# Altium PCB pcb.pcbdoc (part 2 of 6)
Units mm, origin at the board's own origin, x right, y up, seen from the top; angles counter-clockwise.
Board outline 95 x 60 mm, 4 copper layers (Top Layer, TopInt Layer, BotInt Layer, Bottom Layer), stack 1.459 mm thick; 162 components, 164 nets, 673 pads, 269 vias.
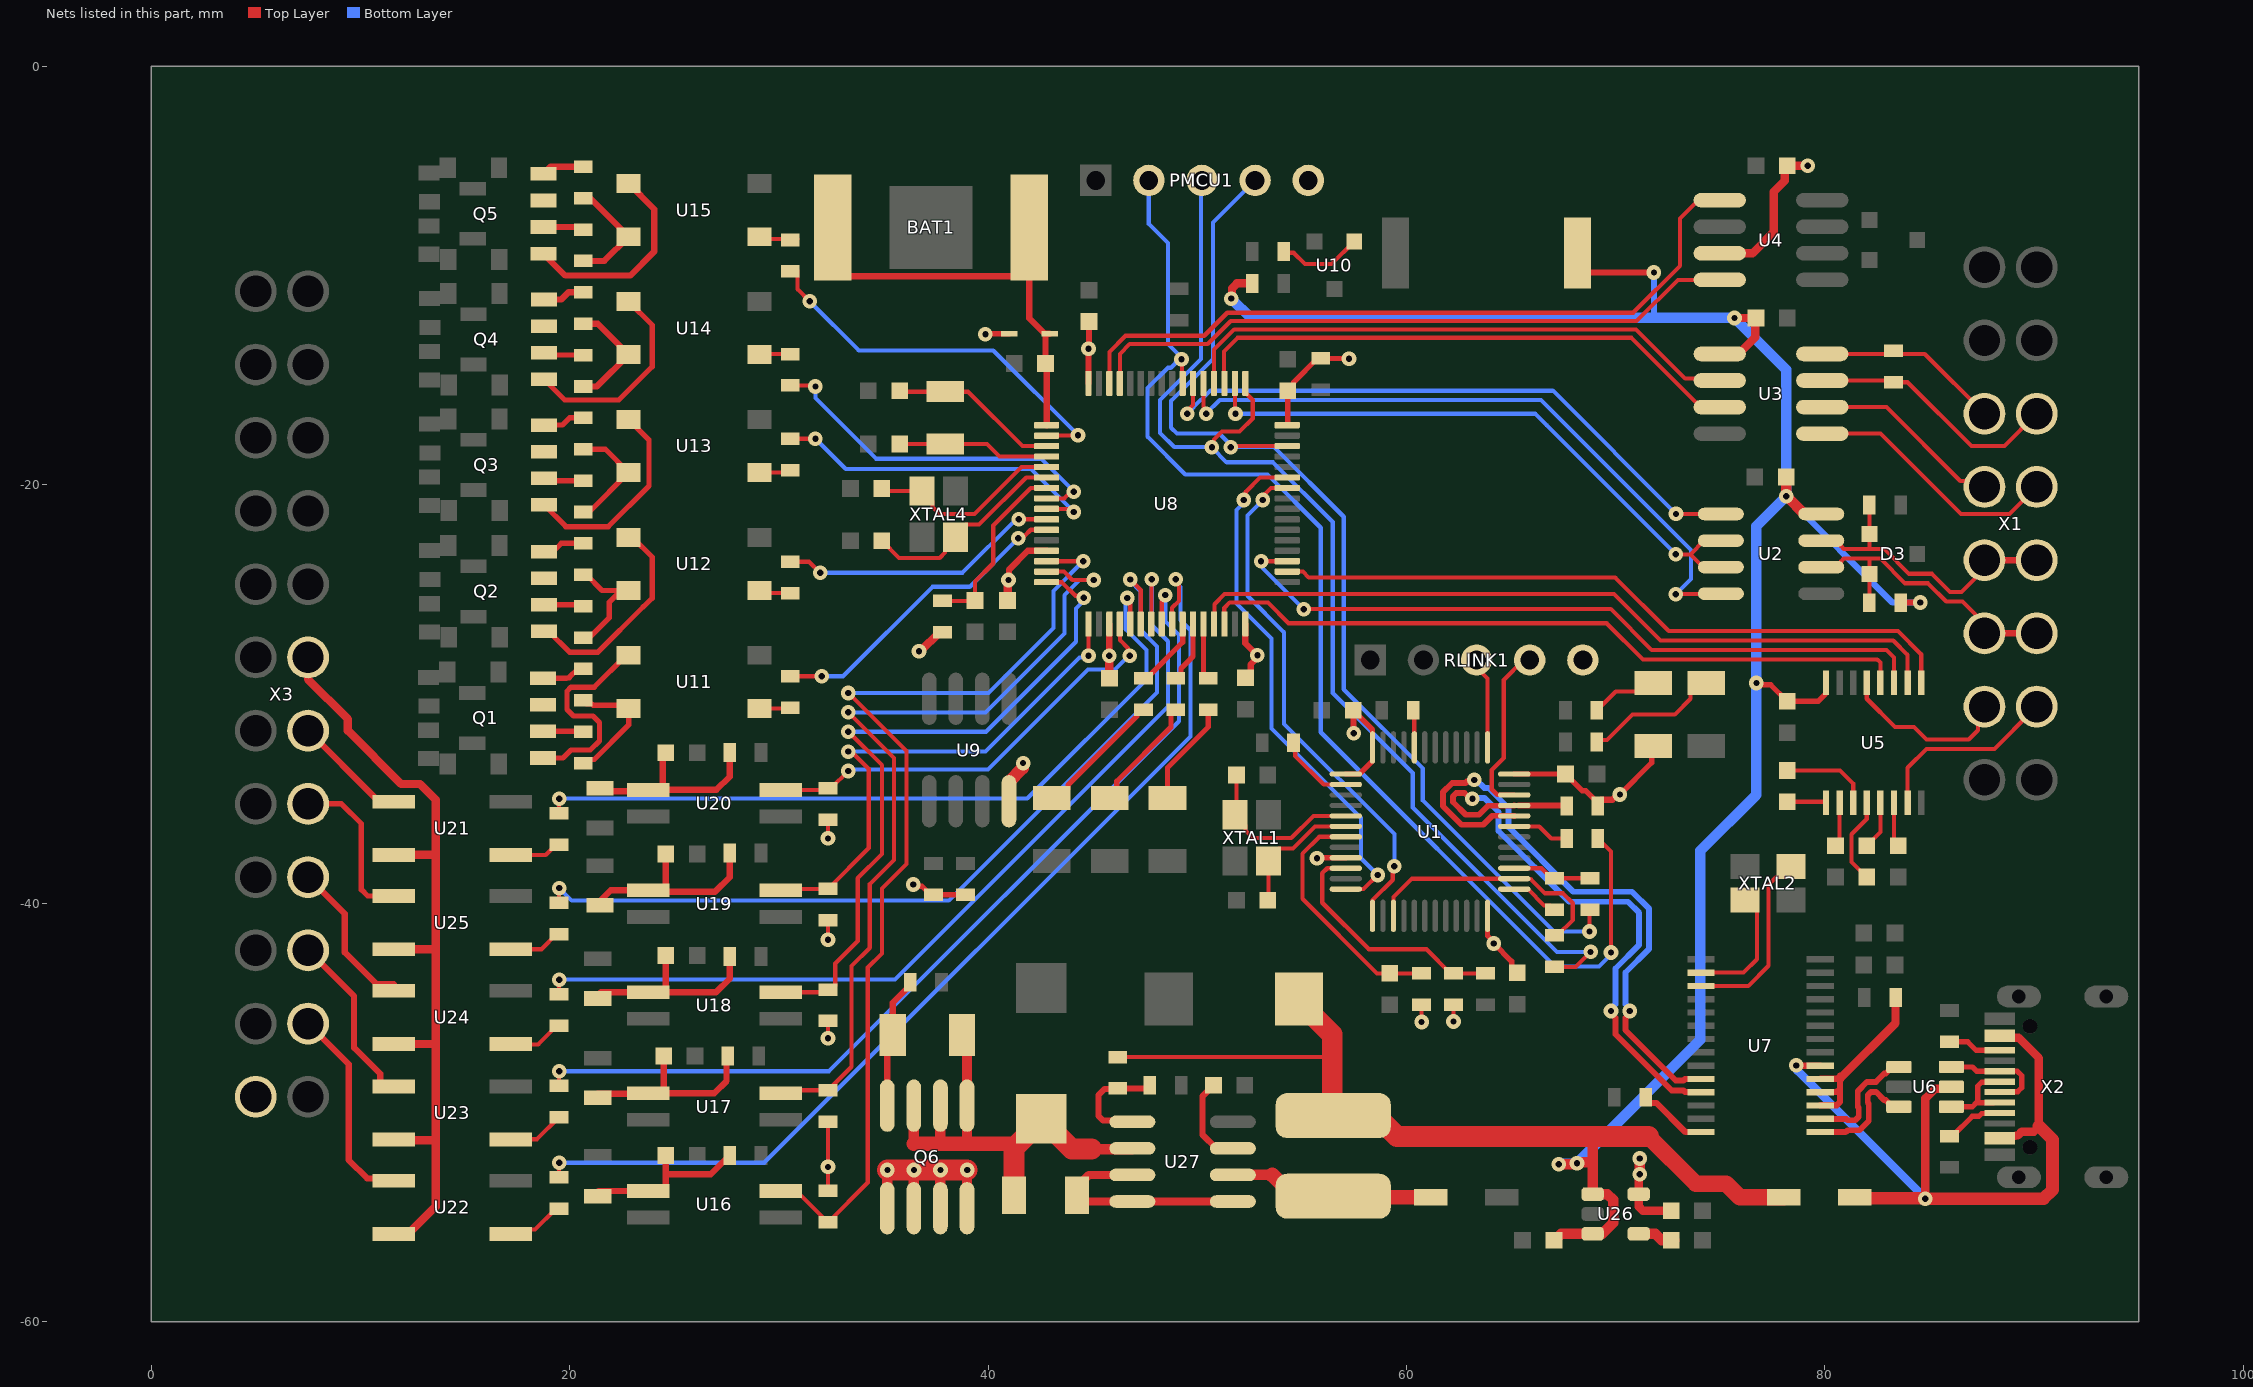
[diagram p4: the nets of this part, all layers, seen from the top]

## Via types
v1: diameter 0.7, hole 0.3, Top Layer to Bottom Layer, tented both sides, 249 vias
v2: diameter 1, hole 0.5, Top Layer to Bottom Layer, tented both sides, 20 vias

## Nets (pads, with @x,y where several pads share a name; then routed paths per layer and width w, separated by ;. In a path a pad name is that pad's centre, name@x,y a point inside that pad or via, vN(x,y) a via of type N, cw(c..) or ccw(c..) an arc to the next point about the centre after c; other vN are vias at no path point) (continued)
NetC4_2: C4.2 R10.1 U1.7 | length 11.7
  Top Layer w0.2: U1.7@57.1,-36.825 55.831,-36.825 55.025,-37.631 55.025,-39.786 58.589,-43.35 C4.2@59.2,-43.35 R10.1@60.725,-43.35
NetC5_2: C5.2 U1.6 XTAL1.1 | length 6.3
  Top Layer w0.2: C5.2@53.375,-39.85 53.4,-39.825 XTAL1.1@53.4,-37.975 53.4,-37.875 53.9,-37.375 54.575,-37.375 55.625,-36.325 U1.6@57.1,-36.325
NetC6_2: C6.2 U1.5 XTAL1.3 | length 8.3
  Top Layer w0.2: C6.2@51.875,-33.875 51.875,-35.7 XTAL1.3@51.8,-35.775 52.3,-36.275 52.3,-36.521 52.663,-36.884 54.491,-36.884 55.55,-35.825 U1.5@57.1,-35.825
NetC10_2: C10.2 U5.2 | length 2.1
  Top Layer w0.2: C10.2@80.5,-37.2 80.7,-37 U5.2@80.7,-35.2
NetC11_2: C11.2 U5.6 | length 2.2
  Top Layer w0.2: U5.6@83.3,-35.2 83.3,-37.3 C11.2@83.35,-37.35
NetC12_1: C12.1 U5.1 | length 1.9
  Top Layer w0.2: C12.1@78.2,-35.15 80,-35.15 U5.1@80.05,-35.2
NetC12_2: C12.2 U5.3 | length 4.3
  Top Layer w0.2: C12.2@78.2,-33.65 80.725,-33.65 81.35,-34.275 U5.3@81.35,-35.2
NetC14_1: C14.1 U5.4 | length 4
  Top Layer w0.2: C14.1@81.85,-38.7 81.85,-38.6 81.275,-38.025 81.275,-36.7 82,-35.975 U5.4@82,-35.2
NetC14_2: C14.2 U5.5 | length 2.4
  Top Layer w0.2: C14.2@81.85,-37.2 82.05,-37.2 82.65,-36.6 U5.5@82.65,-35.2
NetC28_2: C28.2 R30.2 R40.2 U16.1 | length 8.2
  Top Layer w0.3: R30.2@21.35,-53.8 21.4,-53.75 U16.1@23.75,-53.75 24.3,-53.75 24.6,-53.45 24.6,-52.95 ; C28.2@24.6,-52.05 24.6,-52.95 ; R40.2@27.65,-52.05 26.75,-52.95 24.6,-52.95
NetC29_2: C29.2 R31.2 R41.2 U17.1 | length 9.4
  Top Layer w0.3: R31.2@21.35,-49.1 23.73,-49.1 U17.1@23.75,-49.08 U17.1@24.55,-49.08 ; C29.2@24.5,-47.3 24.5,-49.03 U17.1@24.55,-49.08 ; R41.2@27.55,-47.3 27.5,-47.35 27.5,-48.5 26.92,-49.08 U17.1@24.55,-49.08
NetC30_2: C30.2 R32.2 R42.2 U18.1 | length 9.4
  Top Layer w0.3: R32.2@21.35,-44.4 21.5,-44.25 U18.1@23.75,-44.25 U18.1@24.6,-44.25 ; C30.2@24.6,-42.5 U18.1@24.6,-44.25 ; R42.2@27.65,-42.55 27.65,-43.6 27,-44.25 U18.1@24.6,-44.25
NetC31_2: C31.2 R33.2 R43.2 U19.1 | length 10.5
  Top Layer w0.3: R33.2@21.45,-39.9 21.97,-39.38 U19.1@23.75,-39.38 ; C31.2@24.6,-37.65 24.6,-39.38 U19.1@23.75,-39.38 ; R43.2@27.65,-37.6 27.65,-38.75 26.95,-39.45 23.82,-39.45 U19.1@23.75,-39.38
NetC32_2: C32.2 R34.2 R44.2 U20.1 | length 9.9
  Top Layer w0.3: R34.2@21.7,-34.65 23.68,-34.65 U20.1@23.75,-34.58 ; C32.2@24.6,-32.8 24.45,-32.95 24.45,-34.5 23.83,-34.5 U20.1@23.75,-34.58 ; R44.2@27.65,-32.8 27.65,-33.95 27.02,-34.58 U20.1@23.75,-34.58
NetC35_2: C35.2 U27.3 | length 4.3
  Top Layer w0.3: C35.2@50.775,-48.7 50.25,-49.225 50.25,-51.065 50.9,-51.715 U27.3@51.7,-51.715
NetC36_2: C36.2 U26.4 | length 1.8
  Top Layer w0.5: U26.4@71.099,-55.8 71.9,-55.8 72.2,-56.1 C36.2@72.65,-56.1 C36.2@72.8,-56.1
NetD1_2: D1.2 R5.1 | length 3.2
  Top Layer w0.2: R5.1@69.1,-30.775 70,-29.875 71.4,-29.875 D1.2@71.8,-29.475
NetD2_1: D2.1 R6.1 | length 6.6
  Top Layer w0.2: R6.1@69.1,-32.3 69.208,-32.192 69.583,-32.192 70.8,-30.975 72.825,-30.975 73.575,-30.225 73.575,-29.95 74.05,-29.475 D2.1@74.325,-29.475
NetD6_1: D6.1 R25.1 | length 5.6
  Top Layer w0.254: D6.1@45.825,-34.975 46.157,-34.643 46.157,-34.168 48.742,-31.583 48.742,-30.923 48.915,-30.75 R25.1@48.975,-30.75
NetD7_1: D7.1 R26.1 | length 5
  Top Layer w0.254: D7.1@48.575,-34.975 48.575,-33.525 50.525,-31.575 R26.1@50.525,-30.75
NetD8_1: D8.1 R24.1 | length 6.3
  Top Layer w0.254: D8.1@43.05,-34.975 43.375,-34.975 43.823,-34.527 43.823,-34.352 47.102,-31.073 47.102,-30.923 47.275,-30.75 R24.1@47.425,-30.75
NetD9_1: D9.1 Q6.4 R65.1 | length 6.3
  Top Layer w0.3: Q6.4@35.185,-49.673 35.185,-46.564 D9.1@35.449,-46.3 35.449,-44.751 36.275,-43.925 R65.1@36.275,-43.775
NetD11_2: D11.2 L1.1 U27.2 | length 10.4
  Top Layer w0.5: U27.2@51.7,-52.985 53.585,-52.985
  Top Layer w0.7: 53.585,-52.985 L1.1@55.05,-54.45 ; L1.1@54.7,-54.05 D11.2@61.15,-54.05
NetQ1_1: Q1.1 R45.2 | length 1.9
  Top Layer w0.254: Q1.1@18.725,-31.785 20.635,-31.785 R45.2@20.65,-31.8
NetQ1_2: Q1.2 Q1.5 U11.3 | length 10.6
  Top Layer w0.254: Q1.2@18.355,-33.055 Q1.2@18.725,-33.055 19.683,-33.055 20.065,-32.673 20.989,-32.673 21.427,-32.235 21.427,-31.365 21.112,-31.05 20.188,-31.05 19.873,-30.735 19.873,-29.865 20.065,-29.673 21.177,-29.673 22.7,-28.15 U11.3@22.825,-28.15
NetQ1_4: Q1.4 R46.2 | length 2.1
  Top Layer w0.254: Q1.4@18.725,-29.245 19.851,-29.245 19.981,-29.219 20.4,-28.8 R46.2@20.65,-28.8
NetQ2_1: Q2.1 R47.2 | length 1.9
  Top Layer w0.254: Q2.1@18.775,-25.735 20.585,-25.735 R47.2@20.65,-25.8
NetQ2_2: Q2.2 Q2.5 U12.3 | length 9.9
  Top Layer w0.254: Q2.2@19.005,-27.005 20,-28 21.35,-28 23.521,-25.829 23.535,-25.829 23.95,-25.415 23.95,-23.45 23.012,-22.512 U12.3@22.825,-22.512
NetQ2_4: Q2.4 R48.2 | length 2
  Top Layer w0.254: Q2.4@18.775,-23.195 19.205,-23.195 19.6,-22.8 R48.2@20.65,-22.8
NetQ3_1: Q3.1 R49.2 | length 1.8
  Top Layer w0.254: Q3.1@18.89,-19.8 R49.2@20.65,-19.8
NetQ3_2: Q3.2 Q3.5 U13.3 | length 9.8
  Top Layer w0.254: Q3.2@18.775,-20.955 19.82,-22 21.85,-22 23.8,-20.05 23.8,-17.85 U13.3@22.825,-16.875
NetQ3_4: Q3.4 R50.2 | length 2
  Top Layer w0.254: Q3.4@18.775,-17.145 19.655,-17.145 20,-16.8 R50.2@20.65,-16.8
NetQ4_1: Q4.1 R51.2 | length 1.8
  Top Layer w0.254: Q4.1@18.89,-13.8 R51.2@20.65,-13.8
NetQ4_2: Q4.2 Q4.5 U14.3 | length 9.8
  Top Layer w0.254: Q4.2@18.775,-14.955 19.77,-15.95 22.35,-15.95 23.95,-14.35 23.95,-12.363 U14.3@22.825,-11.237
NetQ4_4: Q4.4 R52.2 | length 2
  Top Layer w0.3: Q4.4@18.775,-11.145 19.605,-11.145 19.95,-10.8 R52.2@20.65,-10.8
NetQ5_1: Q5.1 R53.2 | length 1.9
  Top Layer w0.3: Q5.1@18.75,-7.68 20.53,-7.68 R53.2@20.65,-7.8
NetQ5_2: Q5.2 Q5.5 U15.3 | length 10
  Top Layer w0.3: Q5.2@18.75,-8.95 19.8,-10 22.9,-10 24.05,-8.85 24.05,-6.825 U15.3@22.825,-5.6
NetQ5_4: Q5.4 R54.2 | length 2
  Top Layer w0.3: Q5.4@18.75,-5.14 19.09,-4.8 R54.2@20.65,-4.8
NetQ6_5: Q6.5 Q6.6 Q6.7 Q6.8 X3.1 | length 11.6
  Top Layer w0.5: Q6.5@35.185,-54.773 Q6.5@35.185,-54.573 v1@35.185,-52.751 ; Q6.6@36.455,-54.773 Q6.6@36.455,-54.573 v1@36.455,-52.751 ; Q6.7@37.725,-54.773 Q6.7@37.725,-54.573 v1@37.725,-52.751 ; Q6.8@38.995,-54.524 v1@38.995,-52.751
  Top Layer w1: v1(35.19,-52.746) v1(36.46,-52.746) v1(37.73,-52.746) v1(39,-52.746)
NetR1_1: R1.1 R7.1 U1.10 | length 11.8
  Top Layer w0.2: U1.10@57.1,-38.325 56.213,-38.325 55.975,-38.563 55.975,-39.975 58.2,-42.2 60.95,-42.2 62.1,-43.35 R7.1@62.25,-43.35 R1.1@63.775,-43.35
NetR8_1: R8.1 U1.2 | length 3.7
  Top Layer w0.2: R8.1@54.6,-32.325 54.679,-32.404 54.679,-32.958 56.046,-34.325 U1.2@57.1,-34.325
NetR11_1: R11.1 U1.44 | length 1.8
  Top Layer w0.2: R11.1@60.325,-30.775 60.375,-30.825 U1.44@60.375,-32.55
NetR16_2: R16.2 U7.14 | length 3.4
  Top Layer w0.3: R16.2@71.425,-49.275 71.425,-49.393 71.575,-49.543 71.943,-49.543 73.335,-50.935 U7.14@74.075,-50.935
NetR17_1: R17.1 U7.17 U7.18 U7.19 | length 9.3
  Top Layer w0.3: U7.17@79.775,-49.665 79.786,-49.654 80.562,-49.654 80.725,-49.491 80.725,-49.019 80.725,-48.871 ; U7.18@79.775,-49.03 79.786,-49.019 80.576,-49.019 80.725,-48.871 ; U7.19@79.775,-48.395 79.786,-48.384 80.591,-48.384 80.725,-48.25 80.725,-48.384 80.725,-48.871
  Top Layer w0.4: 80.725,-48.384 83.375,-45.734 R17.1@83.375,-44.5
NetR18_2: R18.2 X2.A5 | length 2.9
  Top Layer w0.254: R18.2@85.95,-51.125 86.1,-51.125 87.046,-50.179 87.364,-50.179 87.495,-50.048 88.327,-50.048 X2.A5@88.35,-50.025
NetR19_2: R19.2 X2.B5 | length 2.4
  Top Layer w0.254: R19.2@85.95,-46.625 86.827,-46.625 87.227,-47.025 X2.B5@88.15,-47.025
NetR24_2: R24.2 U8.26 | length 3.5
  Top Layer w0.254: R24.2@47.425,-29.25 47.575,-29.25 49.3,-27.525 U8.26@49.3,-26.65
NetR25_2: R25.2 U8.27 | length 3
  Top Layer w0.254: R25.2@48.975,-29.25 49.05,-29.25 49.223,-29.077 49.223,-28.777 49.8,-28.2 U8.27@49.8,-26.65
NetR26_2: R26.2 U8.28 | length 2.7
  Top Layer w0.254: U8.28@50.3,-26.65 50.3,-29.077 50.473,-29.25 R26.2@50.525,-29.25
NetR28_2: R28.2 U10.1 | length 4.1
  Top Layer w0.2: R28.2@54.125,-8.908 54.608,-8.908 55.15,-9.45 56.417,-9.45 U10.1@57.503,-8.364
NetR35_1: R35.1 U8.11 | length 14.9
  Top Layer w0.2: R35.1@30.75,-29.15 v1(32.05,-29.15) ; v1(41.45,-22.55) 41.546,-22.454 41.735,-22.454 42.04,-22.15 U8.11@42.8,-22.15
  Bottom Layer w0.2: v1(32.05,-29.15) 33.075,-29.15 37.35,-24.875 39.125,-24.875 v1(41.45,-22.55)
NetR35_2: R35.2 U11.1 | length 1.7
  Top Layer w0.2: U11.1@29.075,-30.69 30.71,-30.69 R35.2@30.75,-30.65
NetR36_1: R36.1 U8.10 | length 13.3
  Top Layer w0.2: R36.1@30.75,-23.675 31.45,-23.675 v1(31.975,-24.2) ; v1@41.469,-21.65 U8.10@42.8,-21.65
  Bottom Layer w0.2: v1(31.975,-24.2) 38.784,-24.2 41.334,-21.65 v1(41.469,-21.65)
NetR36_2: R36.2 U12.1 | length 1.7
  Top Layer w0.2: U12.1@29.075,-25.052 29.197,-25.175 R36.2@30.75,-25.175
NetR37_1: R37.1 U8.9 | length 16.2
  Top Layer w0.2: R37.1@30.75,-17.8 v1(31.75,-17.8) ; U8.9@42.8,-21.15 43.815,-21.15 43.965,-21.3 v1(44.1,-21.3)
  Bottom Layer w0.2: v1(31.75,-17.8) 33.2,-19.25 42.05,-19.25 v1(44.1,-21.3)
NetR37_2: R37.2 U13.1 | length 1.6
  Top Layer w0.2: U13.1@29.075,-19.415 R37.2@30.665,-19.415
NetR38_1: R38.1 U8.8 | length 17.2
  Top Layer w0.2: R38.1@30.75,-15.25 31.7,-15.25 v1(31.75,-15.3) ; U8.8@42.8,-20.65 43.64,-20.65 43.965,-20.325 v1(44.1,-20.325)
  Bottom Layer w0.2: v1(31.75,-15.3) 31.75,-15.85 34.65,-18.75 42.525,-18.75 v1(44.1,-20.325)
NetR38_2: R38.2 U14.1 | length 1.7
  Top Layer w0.2: U14.1@29.075,-13.777 29.102,-13.75 R38.2@30.75,-13.75
NetR39_1: R39.1 U8.2 | length 18.7
  Top Layer w0.2: R39.1@30.9,-9.75 30.9,-10.65 v1(31.475,-11.225) ; U8.2@42.8,-17.65 42.813,-17.637 44.288,-17.637 v1(44.3,-17.625)
  Bottom Layer w0.2: v1(31.475,-11.225) 33.825,-13.575 40.25,-13.575 v1(44.3,-17.625)
NetR39_2: R39.2 U15.1 | length 1.9
  Top Layer w0.2: U15.1@29.075,-8.14 29.185,-8.25 R39.2@30.9,-8.25
NetR45_1: R45.1 R46.1 U11.4 | length 5.7
  Top Layer w0.254: R45.1@20.65,-33.3 20.823,-33.127 21.177,-33.127 22.825,-31.48 U11.4@22.825,-30.69 ; R46.1@20.65,-30.3 20.823,-30.473 21.066,-30.473 21.122,-30.528 U11.4@22.538,-30.528
NetR47_1: R47.1 R48.1 U12.4 | length 6
  Top Layer w0.254: R47.1@20.65,-27.3 20.95,-27.3 21.9,-26.35 21.9,-25.6 22.448,-25.052 U12.4@22.825,-25.052 21.552,-25.052 20.8,-24.3 R48.1@20.65,-24.3
NetR49_1: R49.1 R50.1 U13.4 | length 5.6
  Top Layer w0.254: R49.1@20.65,-21.3 20.94,-21.3 U13.4@22.825,-19.415 21.71,-18.3 R50.1@20.65,-18.3
NetR51_1: R51.1 R52.1 U14.4 | length 5.6
  Top Layer w0.3: R51.1@20.65,-15.3 21.302,-15.3 U14.4@22.825,-13.777 21.347,-12.3 R52.1@20.65,-12.3
NetR53_1: R53.1 R54.1 U15.4 | length 5.6
  Top Layer w0.3: R53.1@20.65,-9.3 21.665,-9.3 U15.4@22.825,-8.14 20.985,-6.3 R54.1@20.65,-6.3
NetR55_1: R55.1 U8.14 U16.4 | length 47.5
  Top Layer w0.2: U16.4@30.1,-53.75 30.85,-53.75 R55.1@32.35,-55.25 34.25,-53.35 34.25,-43.075 34.925,-42.4 34.925,-39.3 36.1,-38.125 36.1,-32.725 v1(33.325,-29.95) ; U8.14@42.8,-23.65 v1(44.55,-23.65)
  Bottom Layer w0.2: v1(33.325,-29.95) 40.019,-29.95 43.127,-26.842 43.127,-25.073 v1(44.55,-23.65)
NetR56_1: R56.1 U8.15 U17.4 | length 40.4
  Top Layer w0.2: U17.4@30.1,-49.08 30.243,-48.937 R56.1@32.35,-48.937 33.475,-47.812 33.475,-43 34.35,-42.125 34.35,-39.075 35.5,-37.925 35.5,-33.05 v1(33.325,-30.875) ; U8.15@42.8,-24.15 43.625,-24.15 44.025,-24.55 v1(45.05,-24.55)
  Bottom Layer w0.2: v1(33.325,-30.875) 39.875,-30.875 43.65,-27.1 43.65,-25.275 44.375,-24.55 v1(45.05,-24.55)
NetR57_1: R57.1 U8.16 U18.4 | length 33.4
  Top Layer w0.2: U18.4@30.1,-44.25 32.375,-44.25 32.7,-43.925 32.7,-42.875 33.775,-41.8 33.775,-38.8 34.925,-37.65 34.925,-33.4 v1(33.325,-31.8) ; U8.16@42.8,-24.65 42.81,-24.66 43.538,-24.66 44.182,-25.304 44.479,-25.304 v1(44.575,-25.4)
  Bottom Layer w0.2: v1(33.325,-31.8) 39.9,-31.8 44.2,-27.5 44.2,-25.91 44.575,-25.535 v1(44.575,-25.4)
NetR58_1: R58.1 U8.17 U19.4 | length 25
  Top Layer w0.2: U19.4@30.1,-39.38 30.167,-39.312 R58.1@32.35,-39.312 34.3,-37.362 34.3,-33.59 33.46,-32.75 v1(33.325,-32.75) ; v1(44.8,-28.175) U8.17@44.8,-26.65
  Bottom Layer w0.2: v1(33.325,-32.75) 39.875,-32.75 44.365,-28.26 44.715,-28.26 v1(44.8,-28.175)
NetR59_1: R59.1 U8.20 U20.4 | length 21
  Top Layer w0.2: U20.4@30.1,-34.58 32.27,-34.58 R59.1@32.35,-34.5 32.5,-34.5 v1(33.325,-33.675) ; U8.20@46.3,-26.65 46.3,-27.425 46.679,-27.804 46.679,-28.079 v1(46.775,-28.175)
  Bottom Layer w0.2: v1(33.325,-33.675) 33.4,-33.6 40,-33.6 44.775,-28.825 46.069,-28.825 46.719,-28.175 v1(46.775,-28.175)
NetR60_1: R60.1 U21.1 | length 2.5
  Top Layer w0.2: U21.1@17.188,-37.69 18.86,-37.69 19.35,-37.2 R60.1@19.5,-37.2
NetR60_2: R60.2 U8.21 | length 36.8
  Top Layer w0.2: R60.2@19.5,-35.7 v1(19.5,-35) ; v1(46.65,-25.412) 46.65,-25.547 46.8,-25.697 U8.21@46.8,-26.65
  Bottom Layer w0.2: v1(19.5,-35) 41.875,-35 47.575,-29.3 47.575,-27.9 46.575,-26.9 46.575,-25.487 v1(46.65,-25.412)
NetR61_1: R61.1 U22.1 | length 3.3
  Top Layer w0.2: U22.1@16.729,-55.85 16.983,-55.596 18.354,-55.596 19.35,-54.6 R61.1@19.5,-54.6
NetR61_2: R61.2 U8.25 | length 49.4
  Top Layer w0.2: R61.2@19.5,-53.1 v1(19.5,-52.4) ; U8.25@48.8,-26.65 48.8,-25.873 49.125,-25.549 49.125,-24.809 48.97,-24.655 v1(48.97,-24.519)
  Bottom Layer w0.2: v1(19.5,-52.4) 29.3,-52.4 49.675,-32.025 49.675,-26.95 49.2,-26.475 49.2,-24.885 48.97,-24.655 v1(48.97,-24.519)
NetR62_1: R62.1 U23.1 | length 2.9
  Top Layer w0.2: U23.1@17.074,-51.275 18.45,-51.275 R62.1@19.5,-50.225
NetR62_2: R62.2 U8.24 | length 45
  Top Layer w0.2: R62.2@19.5,-48.725 v1(19.5,-48.025) ; U8.24@48.3,-26.65 48.3,-25.581 48.475,-25.406 v1(48.475,-25.271)
  Bottom Layer w0.2: v1(19.5,-48.025) 32.4,-48.025 49.125,-31.3 49.125,-27.175 48.475,-26.525 v1(48.475,-25.271)
NetR63_1: R63.1 U24.1 | length 2.7
  Top Layer w0.2: U24.1@17.146,-46.75 18.5,-46.75 19.4,-45.85 R63.1@19.5,-45.85
NetR63_2: R63.2 U8.23 | length 43.7
  Top Layer w0.2: R63.2@19.5,-44.35 v1(19.5,-43.65) ; U8.23@47.8,-26.65 47.812,-26.638 47.812,-24.532 v1(47.824,-24.52)
  Bottom Layer w0.2: v1(19.5,-43.65) 35.55,-43.65 48.6,-30.6 48.6,-27.475 47.824,-26.699 v1(47.824,-24.52)
NetR64_1: R64.1 U25.1 | length 2.6
  Top Layer w0.2: U25.1@17.188,-42.198 18.652,-42.198 19.375,-41.475 R64.1@19.5,-41.475
NetR64_2: R64.2 U8.22 | length 41.9
  Top Layer w0.2: R64.2@19.5,-39.975 v1(19.5,-39.275) ; v1(46.8,-24.524) 47.3,-25.024 U8.22@47.3,-26.65
  Bottom Layer w0.2: v1(19.5,-39.275) 20.1,-39.875 38.125,-39.875 48.075,-29.925 48.075,-27.725 47.3,-26.95 47.3,-25.085 46.8,-24.585 v1(46.8,-24.524)
NetR66_2: R66.2 R67.2 U27.5 | length 5.4
  Top Layer w0.3: U27.5@46.9,-50.445 46.843,-50.388 45.513,-50.388 45.275,-50.15 45.275,-49.175 45.575,-48.875 46.175,-48.875 R66.2@46.2,-48.85 47.575,-48.85 R67.2@47.725,-48.7
NetR68_2: R68.2 U27.1 U27.7 U27.8 | length 10.9
  Top Layer w0.4: U27.7@46.9,-52.985 44.815,-52.985 44.25,-53.55 R68.2@44.25,-53.95 44.555,-54.255 U27.8@46.9,-54.255 U27.1@51.7,-54.255
NetU2_1: U2.1 U8.54 | length 30
  Top Layer w0.2: v1(49.525,-16.6) 49.525,-16.465 49.8,-16.19 U8.54@49.8,-15.15 ; v1(72.885,-21.39) 72.887,-21.393 75.023,-21.393 U2.1@75.025,-21.395
  Bottom Layer w0.2: v1(49.525,-16.6) 49.525,-16.581 50.156,-15.95 50.175,-15.95 50.625,-15.5 66.994,-15.5 v1(72.885,-21.39)
NetU2_2: U2.2 U2.3 U8.50 | length 29.4
  Top Layer w0.2: U8.50@51.8,-15.15 51.8,-16.575 v1(51.825,-16.6) ; v1(72.875,-23.325) 73.565,-23.325 ; U2.3@75.025,-23.935 74.175,-23.935 73.565,-23.325 ; U2.2@75.025,-22.665 74.225,-22.665 73.565,-23.325
  Bottom Layer w0.2: v1(51.825,-16.6) 66.15,-16.6 66.7,-17.15 v1(72.875,-23.325)
NetU2_4: U2.4 U8.53 | length 32.5
  Top Layer w0.2: U8.53@50.3,-15.15 50.3,-16.265 50.329,-16.294 50.329,-16.504 v1(50.425,-16.6) ; v1(72.875,-25.225) 72.885,-25.215 75.015,-25.215 U2.4@75.025,-25.205
  Bottom Layer w0.2: v1(50.425,-16.6) 51.075,-15.95 66.425,-15.95 73.6,-23.125 73.6,-24.5 v1(72.875,-25.225)
NetU3_2: U3.2 U8.52 | length 27.2
  Top Layer w0.2: U8.52@50.8,-15.15 50.8,-13.54 51.765,-12.575 70.975,-12.575 73.319,-14.919 74.879,-14.919 U3.2@74.975,-15.015
NetU3_3: U3.3 U8.51 | length 26.9
  Top Layer w0.2: U8.51@51.3,-15.15 51.282,-15.132 51.282,-13.624 51.931,-12.975 70.75,-12.975 74.06,-16.285 U3.3@74.975,-16.285
NetU4_1: U4.1 U8.62 | length 35
  Top Layer w0.2: U8.62@45.8,-15.15 45.8,-13.65 46.575,-12.875 50.334,-12.875 51.434,-11.775 70.834,-11.775 73.075,-9.534 73.075,-7.275 73.955,-6.395 U4.1@74.975,-6.395
NetU4_4: U4.4 U8.61 | length 31.5
  Top Layer w0.2: U8.61@46.3,-15.15 46.3,-13.745 46.77,-13.275 50.499,-13.275 51.599,-12.175 71,-12.175 72.97,-10.205 U4.4@74.975,-10.205
NetU5_9: U5.9 U8.34 | length 33.3
  Top Layer w0.2: U8.34@54.3,-24.15 55.05,-24.15 55.325,-24.425 69.975,-24.425 72.535,-26.985 83.485,-26.985 84.6,-28.1 U5.9@84.6,-29.458
NetU5_10: U5.10 U8.29 | length 36.8
  Top Layer w0.2: U8.29@50.8,-26.65 50.823,-26.627 50.823,-25.71 51.308,-25.225 69.925,-25.225 72.139,-27.439 83.264,-27.439 83.95,-28.125 U5.10@83.95,-29.458
NetU5_11: U5.11 U8.35 | length 34.8
  Top Layer w0.2: v1(53.05,-23.65) U8.35@54.3,-23.65 ; v1(55.084,-25.941) 69.766,-25.941 71.718,-27.893 82.943,-27.893 83.3,-28.25 U5.11@83.3,-29.458
  Bottom Layer w0.2: v1(53.05,-23.65) 53.146,-23.746 53.146,-24.003 v1(55.084,-25.941)
NetU5_12: U5.12 U8.30 | length 34.4
  Top Layer w0.2: U8.30@51.3,-26.65 51.29,-26.64 51.29,-25.885 51.55,-25.625 53.375,-25.625 54.368,-26.618 69.568,-26.618 71.297,-28.347 82.501,-28.347 82.65,-28.496 U5.12@82.65,-29.458
NetU7_2: U7.2 XTAL2.1 | length 6
  Top Layer w0.2: U7.2@74.075,-43.315 74.08,-43.31 76.115,-43.31 76.75,-42.675 76.75,-40.35 76.25,-39.85 XTAL2.1@76.175,-39.85
NetU7_3: U7.3 XTAL2.3 | length 8.9
  Top Layer w0.2: U7.3@74.075,-43.95 76.339,-43.95 77.3,-42.989 77.3,-39.125 77.675,-38.75 77.875,-38.75 XTAL2.3@78.375,-38.25
NRST: C23.2 R23.1 U8.7 | length 8.8
  Top Layer w0.2: R23.1@37.825,-25.55 39.35,-25.55 C23.2@39.375,-25.525 39.375,-24.625 40.25,-23.75 40.25,-21.95 42.043,-20.157 42.793,-20.157 U8.7@42.8,-20.15
OSC32_IN: C20.2 U8.3 XTAL3.2 | length 8.1
  Top Layer w0.2: C20.2@35.775,-15.5 35.825,-15.55 XTAL3.2@37.95,-15.55 39.05,-15.55 41.65,-18.15 U8.3@42.8,-18.15
OSC32_OUT: C18.2 U8.4 XTAL3.1 | length 7.3
  Top Layer w0.2: C18.2@35.775,-18.05 35.838,-18.113 C18.2@35.9,-18.175 ; C18.2@35.9,-18.05 XTAL3.1@37.95,-18.05 39.95,-18.05 40.55,-18.65 U8.4@42.8,-18.65
OSC_MAIN_0: C19.2 U8.5 XTAL4.3 | length 9.5
  Top Layer w0.2: C19.2@34.925,-20.175 35.05,-20.3 XTAL4.3@36.85,-20.3 37.35,-20.8 37.35,-21.053 37.697,-21.4 39.35,-21.4 41.6,-19.15 U8.5@42.8,-19.15
OSC_MAIN_1: C17.2 U8.6 XTAL4.1 | length 9.9
  Top Layer w0.2: C17.2@34.925,-22.675 35.75,-23.5 37.692,-23.5 37.95,-23.242 37.95,-23 XTAL4.1@38.45,-22.5 ; XTAL4.1@38.45,-22.4 38.95,-21.9 39.575,-21.9 41.825,-19.65 U8.6@42.8,-19.65
OUT0: U22.3 X3.23 | length 9.9
  Top Layer w0.3: X3.23@7.5,-45.75 9.45,-47.7 9.45,-52.275 10.326,-53.151 11.491,-53.151 U22.3@11.6,-53.26
OUT1: U23.3 X3.22 | length 8.4
  Top Layer w0.3: X3.22@7.5,-42.25 9.7,-44.45 9.7,-46.9 10.947,-48.147 10.947,-48.572 11.085,-48.709 U23.3@11.509,-48.709
OUT2: U24.3 X3.21 | length 7.3
  Top Layer w0.3: X3.21@7.5,-38.75 9.25,-40.5 9.25,-42.35 10.775,-43.875 U24.3@11.6,-43.875
OUT3: U25.3 X3.20 | length 7.9
  Top Layer w0.254: X3.20@7.6,-35.15 X3.20@7.5,-35.25 9.1,-35.25 10.05,-36.2 10.05,-39.35 10.352,-39.652 11.594,-39.652 U25.3@11.6,-39.658
OUT4: U21.3 X3.19 | length 5.5
  Top Layer w0.3: X3.19@7.5,-31.75 10.72,-34.97 11.42,-34.97 U21.3@11.6,-35.15
OUT_COM: U21.4 U22.4 U23.4 U24.4 U25.4 X3.18 | length 39.8
  Top Layer w0.4: X3.18@7.5,-28.25 7.5,-29.3 9.4,-31.2 9.4,-31.75 11.95,-34.3 12.85,-34.3 13.6,-35.05 13.6,-37.69 ; U22.4@11.592,-55.93 11.852,-55.67 12.43,-55.67 13.6,-54.5 13.6,-51.318 ; U24.4@11.6,-46.724 13.6,-46.724 ; U25.4@11.6,-42.198 13.6,-42.198 ; U21.4@11.6,-37.69 13.6,-37.69 ; U23.4@11.719,-51.318 13.6,-51.318 ; 13.6,-51.318 13.6,-46.724 ; 13.6,-46.724 13.6,-42.198 ; 13.6,-42.198 13.6,-37.69
RLINK_USB_N: U1.32 U7.10 | length 28.9
  Top Layer w0.279: v1(63.237,-34.104) 63.156,-34.185 62.879,-34.185 62.815,-34.248 62.183,-34.248 61.74,-34.692 61.74,-35.353 62.633,-36.247 63.667,-36.247 64.099,-35.814 65.139,-35.814 U1.32@65.15,-35.825 ; v1(70.675,-45.15) 70.675,-45.264 70.464,-45.475 70.464,-46.064 72.873,-48.473 73.24,-48.473 73.308,-48.406 74.064,-48.406 U7.10@74.075,-48.395
  Bottom Layer w0.279: v1(63.237,-34.104) 63.341,-34.104 63.72,-34.484 63.914,-34.484 64.872,-35.442 64.872,-36.347 67.971,-39.446 70.783,-39.446 71.598,-40.261 71.598,-42.179 70.464,-43.313 70.464,-44.825 70.675,-45.036 v1(70.675,-45.15)
RLINK_USB_P: R9.1 U1.33 U7.11 | length 29.5
  Top Layer w0.279: v1(63.15,-35) 63.046,-35 62.773,-34.727 62.382,-34.727 62.218,-34.89 62.218,-35.155 62.832,-35.768 63.468,-35.768 63.901,-35.336 65.139,-35.336 U1.33@65.15,-35.325 ; U1.33@65.36,-35.322 67.622,-35.322 R9.1@67.65,-35.35 ; v1(69.775,-45.15) 69.775,-45.264 69.986,-45.475 69.986,-46.263 72.675,-48.952 73.24,-48.952 73.308,-49.019 74.064,-49.019 U7.11@74.075,-49.03
  Bottom Layer w0.279: v1(63.15,-35) 63.187,-34.963 63.716,-34.963 64.394,-35.64 64.394,-36.546 67.773,-39.925 70.585,-39.925 71.119,-40.459 71.119,-41.981 69.986,-43.115 69.986,-44.825 69.775,-45.036 v1(69.775,-45.15)
RS422_RX_N: R15.2 U3.7 X1.3 | length 12
  Top Layer w0.2: U3.7@79.875,-15.015 R15.2@83.142,-15.015 ; R15.2@83.275,-15.1 83.95,-15.1 87,-18.15 88.575,-18.15 X1.3@90.125,-16.6
RS422_RX_P: R15.1 U3.8 X1.14 | length 9.1
  Top Layer w0.2: U3.8@79.875,-13.745 84.77,-13.745 X1.14@87.625,-16.6 ; X1.14@87.625,-16.675 X1.14@87.775,-16.675
RS422_TX_N: U3.6 X1.13 | length 9.3
  Top Layer w0.2: U3.6@79.875,-16.285 82.935,-16.285 86.468,-19.818 87.343,-19.818 X1.13@87.625,-20.1
RS422_TX_P: U3.5 X1.4 | length 12.4
  Top Layer w0.2: U3.5@79.875,-17.555 82.662,-17.555 86.507,-21.4 88.825,-21.4 X1.4@90.125,-20.1
RS485_N: D3.1 R13.1 U2.7 X1.5 X1.12 | length 14.3
  Top Layer w0.2: U2.7@79.825,-22.665 80.517,-22.665 80.783,-22.931 80.783,-22.956 80.9,-23.073 82.139,-23.073 ; R13.1@82.125,-20.958 D3.1@82.125,-22.353 82.125,-23.058 82.139,-23.073 ; X1.12@87.625,-23.6 87.625,-24.025 86.527,-25.123 85.984,-25.123 85.114,-24.254 84.021,-24.254 82.84,-23.073 82.139,-23.073
  Top Layer w0.3: X1.12@87.625,-23.6 X1.5@90.125,-23.6
RS485_P: D3.2 R14.2 U2.6 X1.6 X1.11 | length 14.4
  Top Layer w0.2: U2.6@79.825,-23.935 80.517,-23.935 80.783,-23.669 80.783,-23.644 80.9,-23.527 82.062,-23.527 ; R14.2@82.125,-25.633 D3.2@82.125,-24.258 82.125,-23.589 82.062,-23.527 ; X1.11@87.625,-27.1 87.625,-26.625 86.577,-25.577 85.795,-25.577 84.926,-24.708 83.833,-24.708 82.652,-23.527 82.062,-23.527
  Top Layer w0.3: X1.11@87.625,-27.1 X1.6@90.125,-27.1
RX1: U5.13 X1.10 | length 8.3
  Top Layer w0.2: U5.13@82,-29.458 82,-30.226 83.349,-31.575 84.25,-31.575 84.85,-32.175 86.875,-32.175 87.318,-31.732 87.318,-30.907 X1.10@87.625,-30.6
STLINK_RX_MCU_TX: U1.13 U8.42 | length 25
  Top Layer w0.2: v1(53.125,-20.725) 53.221,-20.629 53.221,-20.454 53.525,-20.15 U8.42@54.3,-20.15 ; U1.13@58.375,-40.6 58.385,-40.59 58.385,-39.839 59.345,-38.879 59.345,-38.305 v1(59.421,-38.229)
  Bottom Layer w0.2: v1(53.125,-20.725) 53.125,-20.744 52.4,-21.469 52.4,-25.3 54.15,-27.05 54.15,-31.425 59.421,-36.696 v1(59.421,-38.229)
STLINK_TX_MCU_RX: U1.12 U8.43 | length 25.4
  Top Layer w0.2: v1(52.225,-20.725) 52.321,-20.629 52.321,-20.329 53,-19.65 U8.43@54.3,-19.65 ; U1.12@57.101,-39.324 57.951,-39.324 v1(58.625,-38.65)
  Bottom Layer w0.2: v1(52.225,-20.725) 52.225,-20.86 51.875,-21.21 51.875,-25.675 53.55,-27.35 53.55,-31.641 57.825,-35.916 57.825,-37.85 v1(58.625,-38.65)
SWCLK: RLINK1.3 U1.37 | length 4.4
  Top Layer w0.2: RLINK1.3@63.35,-28.375 63.35,-28.727 63.875,-29.252 U1.37@63.875,-32.55
SWCLK1: PMCU1.3 R4.1 U8.49 | length 56.1
  Top Layer w0.2: v1(50.7,-18.2) 50.796,-18.104 50.796,-17.829 51.175,-17.45 52.025,-17.45 52.65,-16.825 52.65,-15.942 52.358,-15.65 52.35,-15.65 52.3,-15.6 U8.49@52.3,-15.15 ; R4.1@67.075,-43.025 67.1,-43.05 68.075,-43.05 v1(68.8,-42.325)
  Bottom Layer w0.2: PMCU1.3@50.225,-5.45 50.175,-5.5 50.175,-13.994 48.225,-15.944 48.225,-17.525 48.9,-18.2 v1(50.7,-18.2) 50.7,-18.219 51.406,-18.925 53.625,-18.925 56.475,-21.775 56.475,-29.956 60.3,-33.781 60.3,-35.425 67.2,-42.325 v1(68.8,-42.325)
SWDIO: RLINK1.4 U1.34 | length 8.3
  Top Layer w0.2: U1.34@65.15,-34.825 65.14,-34.815 64.34,-34.815 64.075,-34.55 64.075,-33.625 64.65,-33.05 64.65,-29.325 65.6,-28.375 RLINK1.4@65.89,-28.375
SWDIO1: PMCU1.4 R3.1 U8.46 | length 53
  Top Layer w0.2: v1(51.6,-18.2) 51.65,-18.15 U8.46@54.3,-18.15 ; v1(68.75,-41.35) 68.75,-40.325 R3.1@68.775,-40.3
  Bottom Layer w0.2: PMCU1.4@52.765,-5.45 50.755,-7.46 50.755,-13.98 48.75,-15.985 48.75,-17.275 49.025,-17.55 51.05,-17.55 51.6,-18.1 v1(51.6,-18.2) 53.675,-18.2 57,-21.525 57,-29.775 60.781,-33.556 60.781,-35.081 67.05,-41.35 v1(68.75,-41.35)
SWO1: PMCU1.2 R2.1 U8.55 | length 59.3
  Top Layer w0.2: v1(49.25,-14) 49.275,-14.025 49.275,-15.125 U8.55@49.3,-15.15 ; R2.1@69.15,-36.9 69.775,-37.525 v1(69.775,-42.35)
  Bottom Layer w0.2: PMCU1.2@47.685,-5.45 47.685,-7.535 48.6,-8.45 48.6,-13.265 49.25,-13.915 v1(49.25,-14) 49.141,-14 48.736,-14.405 48.595,-14.405 47.625,-15.375 47.625,-17.7 49.425,-19.5 53.35,-19.5 55.9,-22.05 55.9,-31.825 67.1,-43.025 69.2,-43.025 69.775,-42.45 v1(69.775,-42.35)
T_JTCK: R4.2 U1.15 U1.26 | length 12.3
  Top Layer w0.2: U1.15@59.375,-40.6 59.375,-39.708 60.258,-38.825 U1.26@65.15,-38.825 65.16,-38.835 65.935,-38.835 66.626,-39.525 67.474,-39.525 67.95,-40.001 67.95,-40.8 67.225,-41.525 R4.2@67.075,-41.525
T_JTMS: R3.2 R12.2 U1.27 | length 3.8
  Top Layer w0.2: U1.27@65.15,-38.325 66.45,-38.325 66.925,-38.8 R12.2@67.075,-38.8 R3.2@68.775,-38.8
T_SWDIO_IN: R12.1 U1.25 | length 2.3
  Top Layer w0.2: U1.25@65.15,-39.325 65.8,-39.325 66.575,-40.1 66.875,-40.1 R12.1@67.075,-40.3
T_SWO: R2.2 U1.31 | length 2.7
  Top Layer w0.2: U1.31@65.15,-36.325 66.344,-36.325 66.919,-36.9 R2.2@67.65,-36.9
TX1: U5.7 X1.7 | length 9
  Top Layer w0.2: U5.7@83.95,-35.2 83.95,-33.525 84.85,-32.625 88.1,-32.625 89.925,-30.8 X1.7@90.1,-30.8
USB_CONN_D_N: U6.4 X2.A7 X2.B7 | length 4
  Top Layer w0.254: U6.4@86.045,-49.725 87.052,-49.725 87.249,-49.528 88.047,-49.528 X2.B7@88.05,-49.525 ; 87.303,-49.528 87.303,-48.74 87.495,-48.548 87.757,-48.548 87.78,-48.525 X2.A7@88.355,-48.525
USB_CONN_D_P: U6.6 X2.A6 X2.B6 | length 6.1
  Top Layer w0.254: U6.6@86.045,-47.825 87.052,-47.825 87.249,-48.022 ; X2.B6@88.175,-48.025 88.172,-48.022 87.249,-48.022 ; X2.A6@88.475,-49.025 88.498,-49.002 89.215,-49.002 89.407,-48.81 89.407,-48.24 89.184,-48.017 88.172,-48.017 87.254,-48.017 87.249,-48.022
USB_N: U6.3 U7.15 | length 5.6
  Top Layer w0.279: U7.15@79.775,-50.935 80.967,-50.935 80.983,-50.919 81.017,-50.919 81.085,-50.852 81.65,-50.852 82.094,-50.408 82.094,-49.579 82.043,-49.528 82.043,-49.178 82.207,-49.014 82.438,-49.014 82.833,-49.409 82.909,-49.409 83.225,-49.725 U6.3@83.535,-49.725
USB_P: U6.1 U7.16 | length 5.6
  Top Layer w0.279: U7.16@79.775,-50.3 79.781,-50.306 81.017,-50.306 81.085,-50.373 81.452,-50.373 81.615,-50.21 81.615,-49.777 81.564,-49.726 81.564,-48.979 82.008,-48.536 82.438,-48.536 82.833,-48.141 82.909,-48.141 83.225,-47.825 U6.1@83.535,-47.825
VBAT: BAT1.P1 C21.2 D5.1 U8.1 | length 21.6
  Top Layer w0.3: BAT1.P1@32.575,-7.7 32.575,-9.29 33.315,-10.03 41.235,-10.03 BAT1.P1@41.975,-9.29 ; BAT1.P1@41.975,-7.7 BAT1.P1@41.975,-9.29 ; U8.1@42.8,-17.15 42.8,-14.25 C21.2@42.75,-14.2 42.75,-12.79 D5.1@42.765,-12.775 ; D5.1@42.94,-12.775 D5.1@42.765,-12.775 ; BAT1.P1@41.975,-9.29 41.975,-12.04 42.71,-12.775 D5.1@42.765,-12.775
VCC3.3V: C1.2 C2.2 C3.2 C8.2 C22.2 C24.2 C25.2 C26.2 C27.2 C37.2 D1.1 D5.2 PMCU1.5 R7.2 R9.2 R10.2 R20.2 R21.2 R22.2 R23.2 R55.2 R56.2 R57.2 R58.2 R59.2 RLINK1.5 U1.1 U1.9 U1.24 U1.36 U1.48 U4.3 U8.13 U8.19 U8.32 U8.48 U8.64 U9.8 U26.5 | length 63.5
  Top Layer w0.2: R55.2@32.35,-53.75 v1(32.35,-52.6) R56.2@32.35,-50.438 ; v1(32.35,-46.45) R57.2@32.35,-45.625 ; v1(32.35,-41.75) R58.2@32.35,-40.813 ; v1(32.35,-36.9) R59.2@32.35,-36 ; v1(60.722,-45.675) 60.725,-45.672 R10.2@60.725,-44.875 ; v1(62.247,-45.65) 62.25,-45.647 R7.2@62.25,-44.85
  Top Layer w0.254: v1(36.425,-39.1) 36.51,-39.185 36.835,-39.185 37.25,-39.6 R21.2@37.4,-39.6 R22.2@38.925,-39.6 ; v1(39.875,-12.8) 39.892,-12.783 41.002,-12.783 D5.2@41.01,-12.775 ; U8.48@54.3,-17.15 54.302,-17.15 54.325,-17.127 C25.2@54.325,-15.5 54.598,-15.227 54.598,-15.102 55.75,-13.95 R20.2@55.9,-13.95 55.913,-13.963 57.238,-13.963 v1(57.25,-13.975) ; v1(55.725,-37.85) 55.748,-37.827 57.098,-37.827 U1.9@57.1,-37.825 ; U1.1@57.1,-33.825 57.746,-33.825 58.375,-33.196 U1.48@58.375,-32.55 58.375,-31.7 57.723,-31.048 57.463,-30.788 C1.2@57.45,-30.775 ; U1.24@63.875,-40.6 63.875,-41.553 64.09,-41.768 v1@64.09,-41.84 ; v1(64.175,-41.925) 65.027,-42.777 65.027,-43.052 C2.2@65.3,-43.325 ; U1.36@65.15,-33.825 C3.2@67.6,-33.825 68.403,-34.628 68.578,-34.628 R9.2@69.15,-35.2 ; v1(70.2,-34.8) 71.718,-33.282 71.718,-32.557 D1.1@71.8,-32.475
  Top Layer w0.3: v1(40.976,-24.548) 41.006,-24.518 41.006,-24.046 41.902,-23.15 U8.13@42.8,-23.15 ; U8.64@44.8,-15.15 v1(44.8,-13.5) 44.825,-13.475 C22.2@44.825,-12.325 ; v1(45.8,-28.175) U8.19@45.8,-26.65 ; C27.2@52.3,-29.225 52.55,-28.975 52.55,-28.583 52.875,-28.258 v1(52.875,-28.15) 52.3,-27.575 U8.32@52.3,-26.65 ; C1.2@57.463,-30.788 57.463,-31.863 v1(57.475,-31.875) ; R9.2@69.15,-35.35 69.15,-35.2 69.3,-35.05 69.842,-35.05 70.092,-34.8 v1(70.2,-34.8)
  Top Layer w0.4: v1(36.7,-27.95) 36.775,-27.95 37.675,-27.05 R23.2@37.825,-27.05 ; C26.2@40.925,-25.525 40.951,-25.499 40.951,-24.574 v1(40.976,-24.548) ; C24.2@45.8,-29.25 v1(45.8,-28.175) ; v1@71.1,-52.2 U26.5@71.099,-53.9 71.1,-54.5 71.3,-54.7 C37.2@72.65,-54.7 ; U4.3@74.975,-8.935 76.54,-8.935 77.55,-7.925 77.55,-6 78.076,-5.474 78.076,-4.874 C8.2@78.2,-4.75 v1(79.175,-4.75)
  Top Layer w0.5: v1(71.15,-52.95) v1(71.15,-52.2)
  Top Layer w0.6: U9.8@41,-35.125 41,-34.198 41.656,-33.542 41.656,-33.319 v1(41.675,-33.3)
VCC5V: BUZ1.1 C7.2 C9.2 C13.2 C33.1 C34.2 D10.2 L1.2 R14.1 R29.2 R66.1 U2.8 U3.1 U5.16 U26.1 U26.3 | length 149.2
  Top Layer w0.2: R66.1@46.2,-47.35 56.25,-47.35 56.45,-47.15
  Top Layer w0.254: v1(76.725,-29.475) 76.81,-29.56 77.41,-29.56 78.168,-30.318 C9.2@78.168,-30.382 ; C9.2@78.2,-30.35 79.675,-30.35 80.025,-30 80.025,-29.483 U5.16@80.05,-29.458
  Top Layer w0.3: BUZ1.1@68.175,-8.925 68.175,-9.35 68.675,-9.85 v1(71.825,-9.85) ; R14.1@83.625,-25.633 83.633,-25.625 v1(84.55,-25.625)
  Top Layer w0.4: v1(51.625,-11.1) 51.662,-11.063 51.662,-10.609 51.896,-10.375 R29.2@52.625,-10.375 ; U3.1@74.975,-13.745 75.875,-13.745 76.675,-12.945 76.675,-12.05 C7.2@76.7,-12.025 v1(75.675,-12.025)
  Top Layer w0.5: C34.2@67.1,-56.1 67.4,-55.8 U26.3@68.899,-55.8 69.346,-55.8 69.879,-55.266 69.879,-54.179 69.6,-53.9 U26.1@68.899,-53.9 68.899,-51.199 68.85,-51.15 68.8,-51.1 ; v1(67.275,-52.475) v1@68.15,-52.475 ; v1(68.15,-52.425) 68.188,-52.387 68.899,-52.387 ; C13.2@78.15,-19.625 v1(78.15,-20.55) 78.165,-20.55 79.01,-21.395 U2.8@79.825,-21.395
  Top Layer w0.8: 71.575,-51.15 73.825,-53.4 75.275,-53.4 75.925,-54.05 D10.2@78.025,-54.05
  Top Layer w1: C33.1@54.86,-44.575 54.86,-44.685 56.45,-46.275 56.45,-47.15 56.45,-50.1 58.5,-50.1 59.55,-51.15 68.85,-51.15 71.575,-51.15
  Bottom Layer w0.3: v1(71.825,-9.85) 71.825,-12.024 71.826,-12.025 ; v1(78.15,-20.55) 83.225,-25.625 v1(84.55,-25.625)
  Bottom Layer w0.5: v1(51.625,-11.1) 52.55,-12.025 71.826,-12.025 v1(75.675,-12.025) 78.15,-14.5 v1(78.15,-20.55) 76.725,-21.975 76.725,-34.825 74.05,-37.5 74.05,-46.525 v1(68.15,-52.425) 68.125,-52.45 67.3,-52.45 v1(67.275,-52.475)
VCC5VUSB: D10.1 U6.5 U7.20 X2.A4B9 X2.B4A9 | length 36.7
  Top Layer w0.3: v1(78.625,-47.75) 78.635,-47.76 U7.20@79.775,-47.76
  Top Layer w0.4: v1(84.8,-54.12) 84.8,-49.325 85.255,-48.87 85.95,-48.87 U6.5@86.045,-48.775 ; X2.B4A9@88.355,-46.325 88.455,-46.425 89.25,-46.425 90.225,-47.4 90.225,-50.65 90.225,-50.681 89.991,-50.915 89.406,-50.915 89.221,-51.1 89.114,-51.1 89.089,-51.125 88.675,-51.125 X2.A4B9@88.65,-51.15
  Top Layer w0.6: D10.1@81.425,-54.05 81.481,-54.106 84.786,-54.106 v1(84.8,-54.12) 90.454,-54.12 90.875,-53.699 90.875,-51.3 90.225,-50.65
  Bottom Layer w0.4: v1(78.625,-47.75) 78.682,-47.807 78.682,-48.002 v1(84.8,-54.12)
VCC24V: C38.1 D9.2 Q6.1 Q6.2 Q6.3 R68.1 U27.6 | length 22.8
  Top Layer w0.5: Q6.3@36.455,-49.673 36.455,-51.495 36.46,-51.5 ; 37.725,-51.495 Q6.2@37.725,-49.673 ; D9.2@38.751,-46.3 38.995,-46.544 Q6.1@38.995,-49.673 38.995,-51.495 ; 41.05,-51.5 41.25,-51.7 ; 44.95,-51.75 U27.6@46.865,-51.75
  Top Layer w0.7: 36.46,-51.5 37.725,-51.5 38.995,-51.5 41.05,-51.5
  Top Layer w1: R68.1@41.25,-53.95 41.25,-51.7 42.6,-50.35 44,-51.75 44.95,-51.75
pads on no net: RLINK1.2 U1.3 U1.4 U1.11 U1.14 U1.16 U1.17 U1.18 U1.19 U1.21 U1.22 U1.28 U1.29 U1.38 U1.39 U1.40 U1.41 U1.42 U1.43 U1.45 U1.46 U4.5 U4.8 U5.8 U5.14 U7.4 U7.5 U7.6 U7.7 U7.12 U7.13 U7.22 U7.23 U7.24 U7.25 U7.27 U7.28 U8.33 U8.36 U8.37 U8.38 U8.39 U8.40 U8.41 U8.56 X2. X2.A8 X2.B8 XTAL1.2 XTAL1.4 XTAL2.2 XTAL2.4 XTAL4.2 XTAL4.4
copper on no net: | length 993.8